# Altium PCB barbarov_guc_dagitim_karti.PcbDoc
Units mm, origin at the board's own origin, x right, y up, seen from the top; angles counter-clockwise.
Board outline 134.37 x 81.41 mm, 2 copper layers (Top Layer, Bottom Layer), stack 1.59 mm thick; 29 components, 11 nets, 108 pads, 0 vias.
Unrouted connection lines stored in the file: 6.
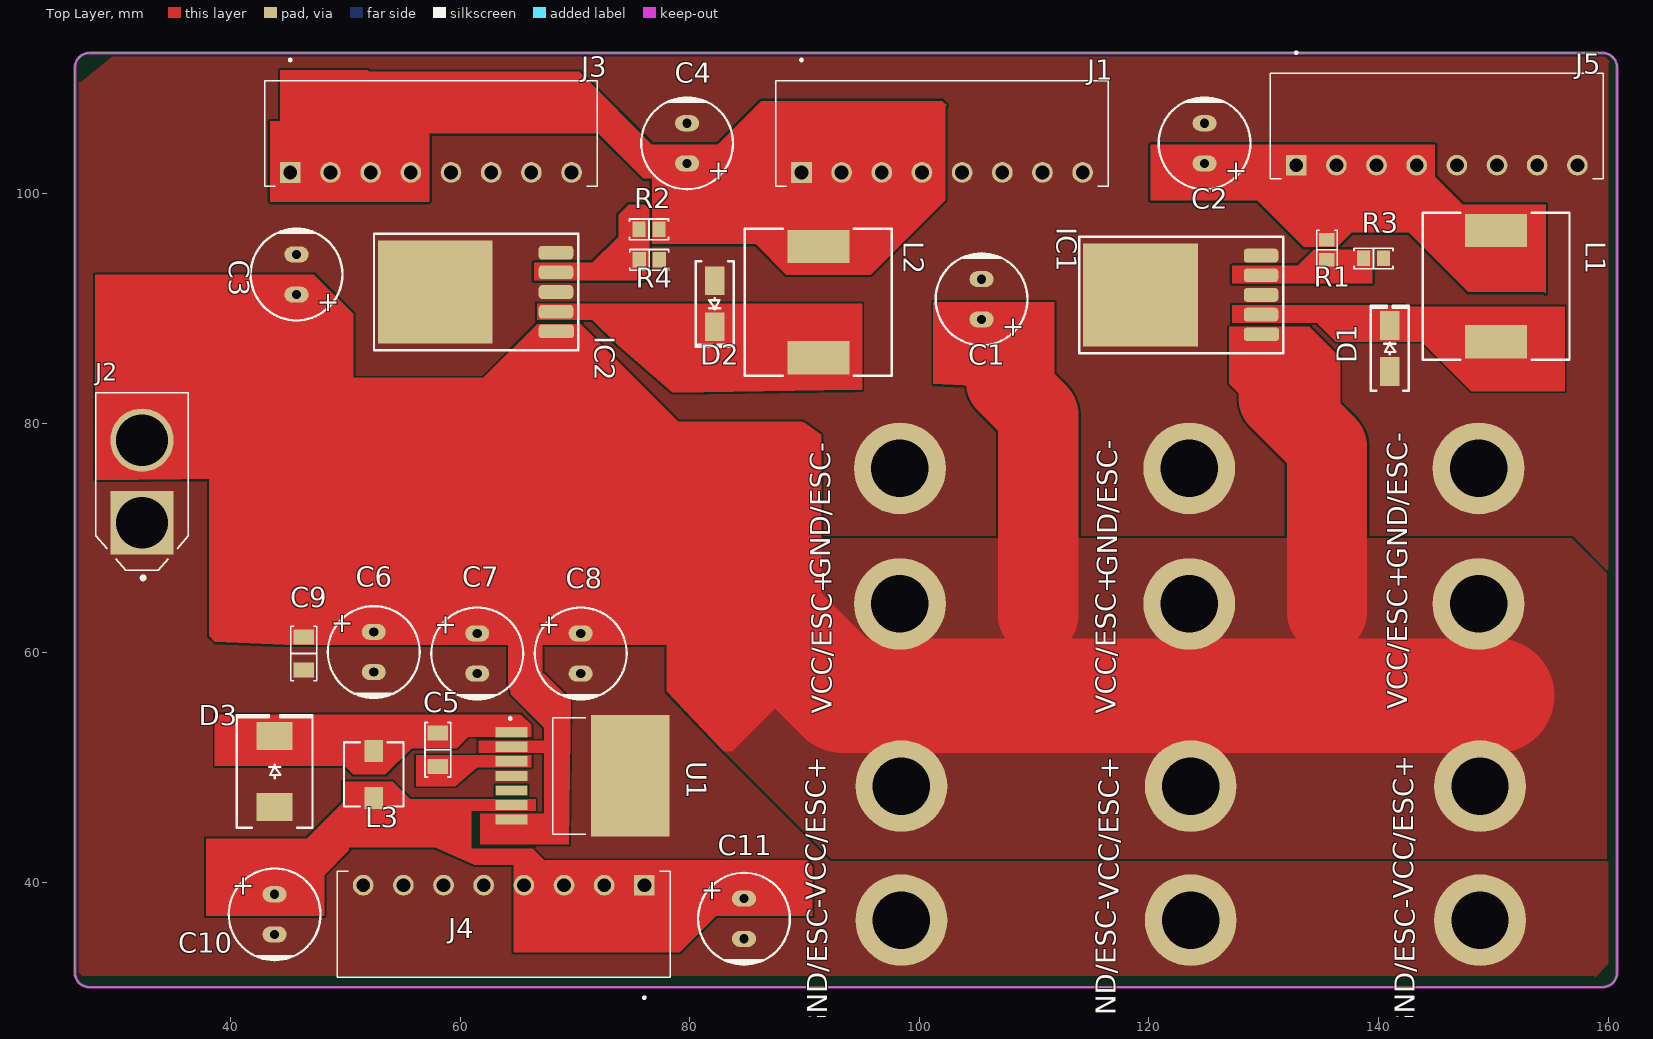
[diagram p0: Top Layer view]
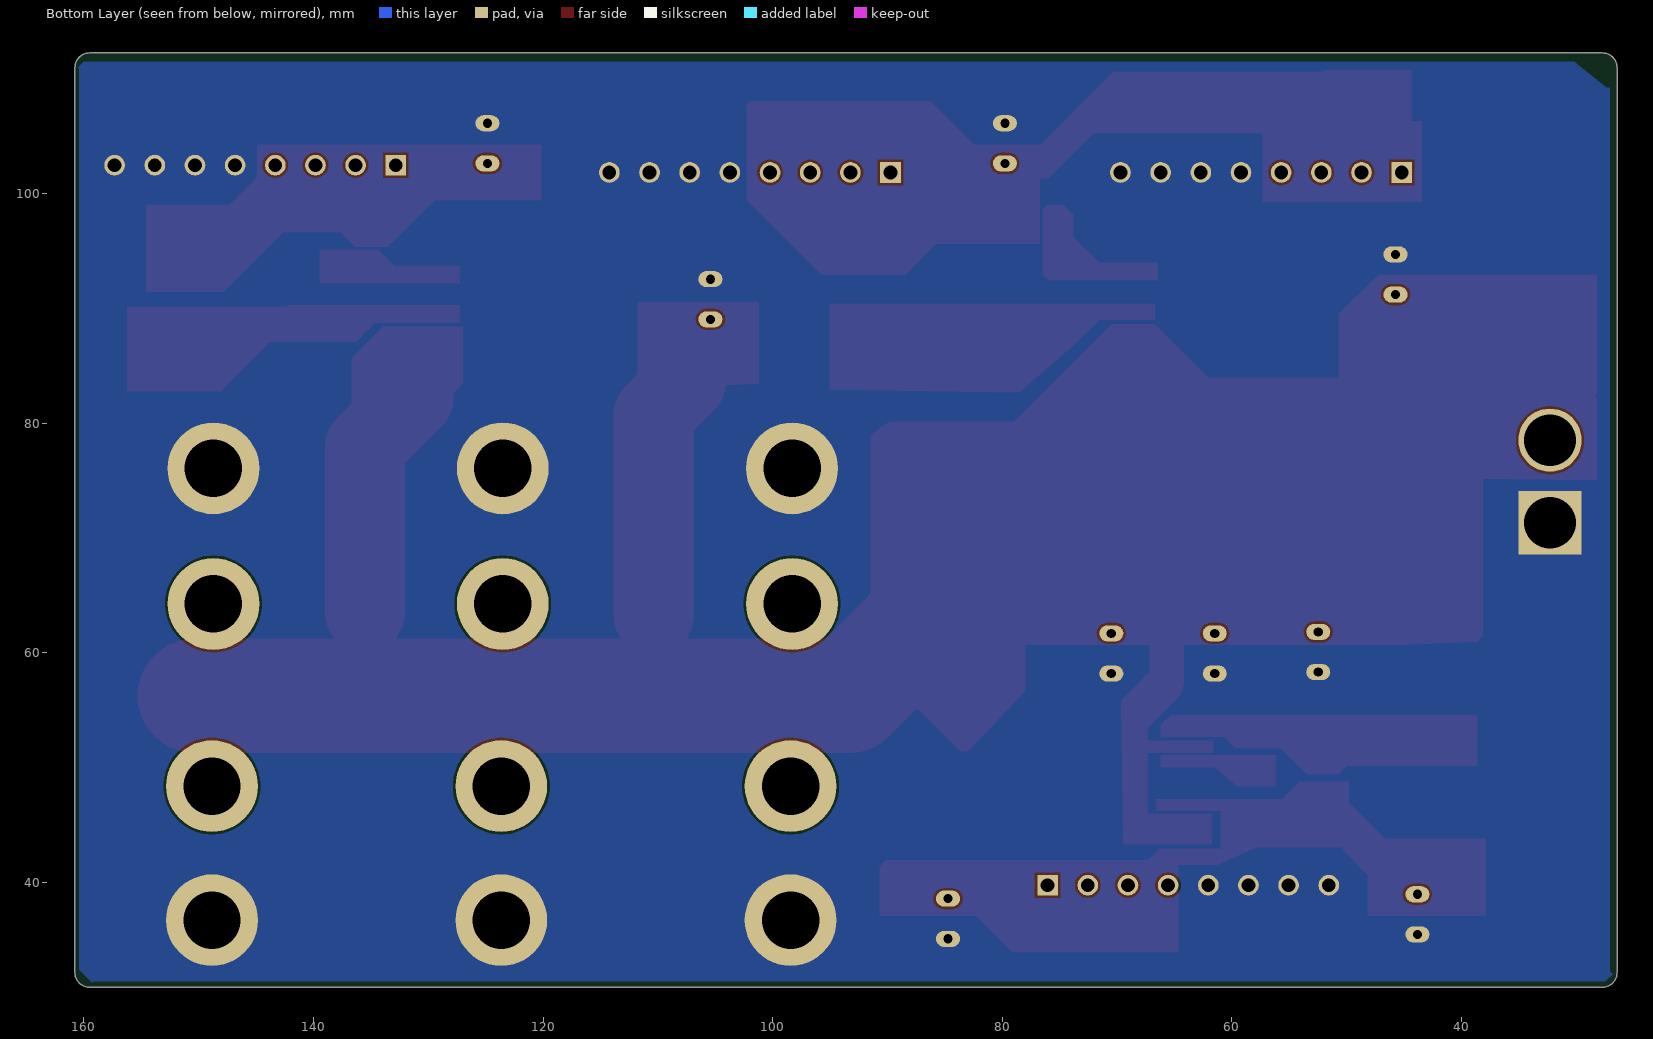
[diagram p1: Bottom Layer view, seen from below]
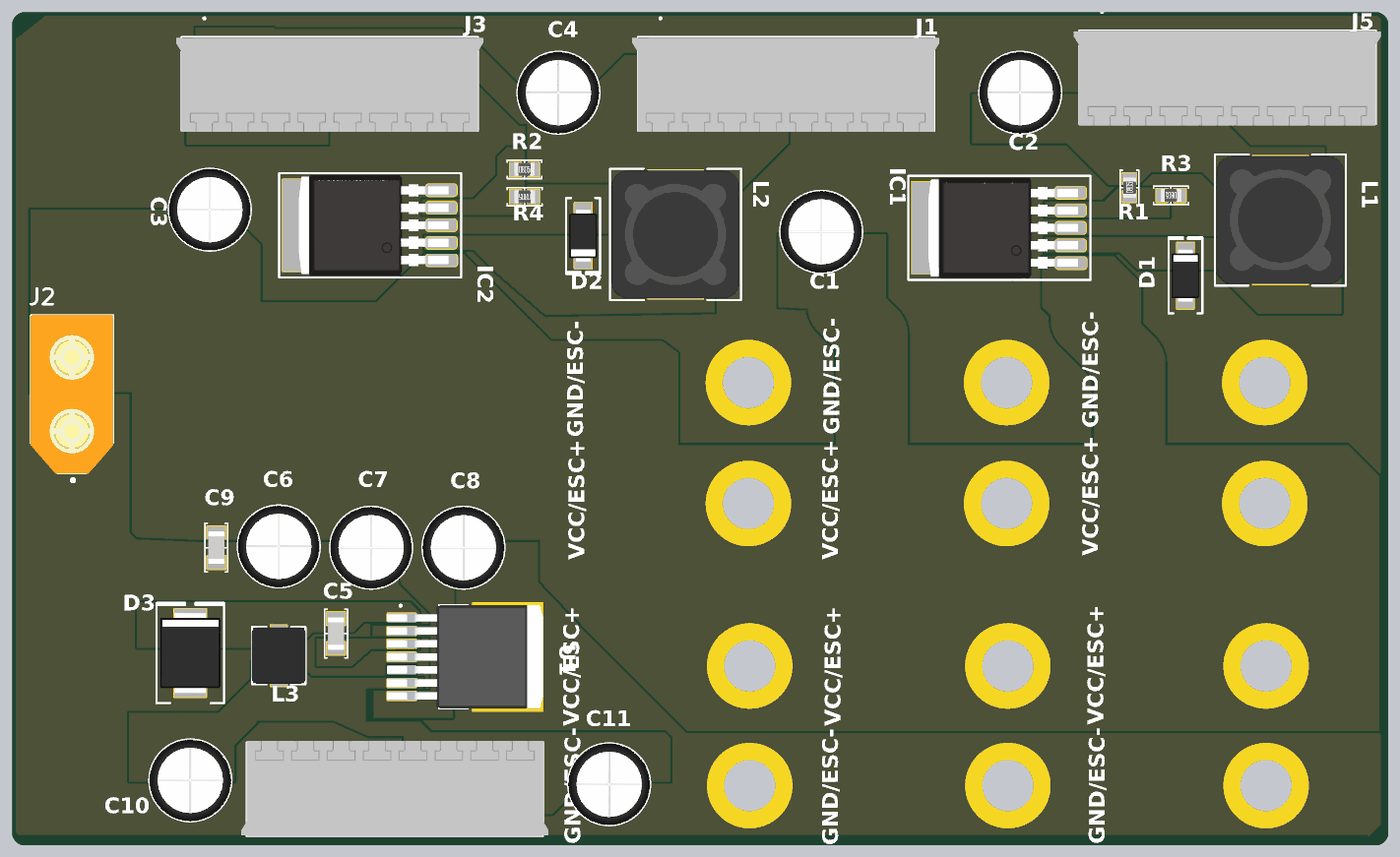
[diagram p2: 3D render of the assembled board from above, using the file's embedded part models]

## Layer stack, top to bottom
Top Solder: solder mask 0.0102, Solder Resist, Dk 3.5
Top Layer: signal copper 0.07
Dielectric 1: dielectric 1.45, FR-4, Dk 4.8
Bottom Layer: signal copper 0.07
Bottom Solder: solder mask 0.0102, Solder Resist, Dk 3.5

## Board outline
27.686,30.861 cw(c27.686,32.131) 26.416,32.131 26.416,110.998 cw(c27.686,110.998) 27.686,112.268 159.512,112.268 cw(c159.512,110.998) 160.782,110.998 160.782,32.131 cw(c159.512,32.131) 159.512,30.861

## Design rules (kind name [scope] priority, off if disabled: settings)
BoardOutlineClearance [All] p1: gap=0.2 ignorepadtopadclearanceinfootprint=FALSE
Clearance [All] p1: gap=0.203 ignorepadtopadclearanceinfootprint=FALSE except(0.25: Arc-Hole Track-Hole SMDPad-Hole THPad-Hole Via-Hole Fill-Hole Poly-Hole Region-Hole Text-Hole)
ComponentClearance [All] p1: gap=0.127 collisioncheckmode=3 verticalgap=0.127 showdistances=TRUE
DiffPairsRouting [All] p1: maxlimit=0.381 minlimit=0.203 mostfreqgap=0.203 toplayer_minwidth=0.203 toplayer_maxwidth=25.4 toplayer_prefwidth=0.203 bottomlayer_minwidth=0.203 bottomlayer_maxwidth=25.4 bottomlayer_prefwidth=0.203 maxuncoupledlength=12.7
Height [All] p1: minheight=0 maxheight=1816.048 prefheight=12.7
HoleSize [All] p1: absolutevalues=TRUE maxlimit=6.3 minlimit=0.3 maxpercent=80.000 minpercent=20.000
HoleToHoleClearance [All] p1: gap=0.25 allowstackedmicrovias=FALSE
MinimumAnnularRing [All] p1: minimumring=0.076
MinimumSolderMaskSliver [All] p1: minsoldermaskwidth=0
PlaneClearance [All] p1: clearance=0.203
PlaneConnect PlaneConnectPowerPads [InPadClass('PowerPads')] p1: planeconnectstyle=Direct reliefexpansion=0.508 reliefentries=4 reliefconductorwidth=0.254 reliefairgap=0.254
PlaneConnect [All] p2: pad.planeconnectstyle=Relief pad.reliefexpansion=0.3 pad.reliefentries=4 pad.reliefconductorwidth=0.203 pad.reliefairgap=0.203 via.planeconnectstyle=Direct via.reliefexpansion=0.3 via.reliefentries=4 via.reliefconductorwidth=0.127 via.reliefairgap=0.127
PolygonConnect PolygonConnectPowerPads [All vs (InPadClass('PowerPads'))] p1: connectstyle=Direct reliefconductorwidth=0.254 reliefentries=4 polygonreliefangle="90 Angle" airgapwidth=0.254
PolygonConnect [All] p2: thpad.connectstyle=Direct thpad.reliefconductorwidth=0.203 thpad.reliefentries=4 thpad.polygonreliefangle="90 Angle" thpad.airgapwidth=0.203 smdpad.connectstyle=Relief smdpad.reliefconductorwidth=0.8 smdpad.reliefentries=4 smdpad.polygonreliefangle="90 Angle" smdpad.airgapwidth=0.1 via.connectstyle=Direct via.reliefconductorwidth=0.127 via.reliefentries=4 via.polygonreliefangle="90 Angle" via.airgapwidth=0.127
RoutingVias [All] p1: holewidth=0.3 width=0.6 viastyle="Through Hole" minholewidth=0.3 minwidth=0.6 maxholewidth=0.6 maxwidth=6.6
SilkToSilkClearance [All] p1: silktosilkclearance=0
SilkToSolderMaskClearance [IsPad] p1: minsilkscreentomaskgap=0.127 clearancetoexposedcopper=TRUE
SolderMaskExpansion [All] p1: expansion=0.075 istentingtop=FALSE
Width [All] p1: maxlimit=25.4 minlimit=0.203 preferedwidth=0.203 minimp=50.000000 maximp=50.000000 favimp=50.000000
20 further rules are at their usual default settings.

## Components (designator, comment, footprint, x,y, rotation, side; value= is the part's Value field where it differs from the comment)
C1 "100µF" "CAP TH ALUM ELEC D8.00mm S3.50mm H12.50mm" 105.41,90.805 r270 top
C2 "220µF" "CAP TH ALUM ELEC D8.00mm S3.50mm H12.50mm" 124.841,104.394 r270 top
C3 "100µF" "CAP TH ALUM ELEC D8.00mm S3.50mm H12.50mm" 45.72,92.964 r270 top
C4 "220µF" "CAP TH ALUM ELEC D8.00mm S3.50mm H12.50mm" 79.756,104.394 r270 top
C5 "0.1µF" "CAP 1206_3216 - 1.8MM" 58.039,51.562 r270 top
C6 "15µF" "CAP TH ALUM ELEC D8.00mm S3.50mm H11.50mm" 52.451,60.071 r90 top
C7 "15µF" "CAP TH ALUM ELEC D8.00mm S3.50mm H11.50mm" 61.468,59.944 r90 top
C8 "15µF" "CAP TH ALUM ELEC D8.00mm S3.50mm H11.50mm" 70.485,59.944 r90 top
C9 "0.47µF" "CAP 1206_3216 - 1.8MM" 46.355,59.944 r90 top
C10 "180µF" "CAP TH ALUM ELEC D8.00mm S3.50mm H13.00mm" 43.815,37.211 r90 top
C11 "180µF" "CAP TH ALUM ELEC D8.00mm S3.50mm H13.00mm" 84.709,36.83 r90 top
D1 "ACDBA560-HF" "DO214AC SMA" 140.97,86.519 r90 top
D2 "ACDBA560-HF" "DO214AC SMA" 82.169,90.424 r270 top
D3 "SMLJ60S05-TP" "DO214AB SMC" 43.815,49.657 r90 top
IC1 "LM2596" D2PAK 120.904,91.186 r90 top
IC2 "LM2596" D2PAK 59.466,91.44 r90 top
J1 "KLEMENS" TE_284512-8 101.968,101.854 r0 top
J2 "XT60-M" AMASS_XT60-M 32.258,74.93 r90 top
J3 "KLEMENS" TE_284512-8 57.432,101.854 r0 top
J4 "KLEMENS" TE_284512-8 63.782,39.751 r180 top
J5 "KLEMENS" TE_284512-8 145.077,102.489 r0 top
L1 "33µH" "BOURNS SRR1280" 150.241,91.948 r90 top
L2 "33µH" "BOURNS SRR1280" 91.186,90.551 r90 top
L3 "2.2µH" "WURTH 5040" 52.451,49.403 r270 top
R1 "8.75 kOhms" "RES 0805_2012" 135.509,95.123 r90 top
R2 "3 kOhms" "RES 0805_2012" 76.44,96.901 r0 top
R3 "1 kOhms" "RES 0805_2012" 139.559,94.361 r180 top
R4 "1 kOhms" "RES 0805_2012" 76.454,94.234 r180 top
U1 "LM2678SX-5.0/NOPB" TO127P1435X464-8N 70.643,49.276 r270 top

## Footprints (in the part's own frame and the unit in brackets; to place one, negate y for a bottom-side part, rotate by r counter-clockwise, add the part's x,y. Pads: shape width x height; smd on the part's side, far side on the other; paste and mask are expansions set on the pad)
AMASS_XT60-M [mm]
  rect 5.516x5.516 hole 4.5: 1(-3.6,0)
  round 5.516 hole 4.5: 2(3.6,0)
  silkscreen extent -8.55,-4.05 7.75,4.05, body extent -7.75,-4.05 7.75,4.05, height 15.88
"BOURNS SRR1280" [mm] "Precision Wire Wound Inductor, 2-Leads, Body 12.50x12.50mm, IPC Medium Density"
  rect 2.9x5.4 smd: 1(-4.85,0) 2(4.85,0)
  silkscreen extent -6.4,-6.4 6.4,6.4, body extent -6.25,-6.25 6.25,6.25, height 7.9
"CAP 1206_3216 - 1.8MM" [mm] "Chip Capacitor, 2-Leads, Body 3.25x1.60mm, IPC Medium Density"
  rect 1.3x1.8 smd: 1(-1.45,0) 2(1.45,0)
  silkscreen extent -2.37,-1.12 2.37,1.12, body extent -1.6,-0.8 1.6,0.8, height 1.8
"CAP TH ALUM ELEC D8.00mm S3.50mm H11.50mm" [mm] "8mm Diameter 3.5mm Lead Spacing Aluminum Electrolytic Capacitors Radial, Can"
  oval 1.4x2.1 hole 0.8: 1(1.75,0) 2(-1.75,0)
  silkscreen extent -4,-4 4,4, body extent -4.01,-4 4,4, height 11.5
"CAP TH ALUM ELEC D8.00mm S3.50mm H12.50mm" [mm] "8mm Diameter 3.5mm Lead Spacing Aluminum Electrolytic Capacitors Radial, Can"
  oval 1.4x2.1 hole 0.8: 1(1.75,0) 2(-1.75,0)
  silkscreen extent -4,-4 4,4, body extent -4.01,-4 4,4, height 12.5
"CAP TH ALUM ELEC D8.00mm S3.50mm H13.00mm" [mm] "8mm Diameter 3.5mm Lead Spacing Aluminum Electrolytic Capacitors Radial, Can"
  oval 1.4x2.1 hole 0.8: 1(1.75,0) 2(-1.75,0)
  silkscreen extent -4,-4 4,4, body extent -4.01,-4 4,4, height 13
D2PAK [mm]
  rrect50% 1.2x3.075 smd: 1(-3.429,-8.89)
  rrect50% 1.2x3.015 smd: 2(-1.714,-8.86) 3(0,-8.86) 4(1.715,-8.86) 5(3.429,-8.86)
  rect 9x10 smd: 3(0,1.651)
  silkscreen extent -5.08,-10.79 5.08,6.98, body extent -4.91,-9.56 4.91,5.04, height 4.22
"DO214AB SMC" [mm] "Molded Diode, 2-Leads, Body 6.85x5.90mm, IPC Medium Density"
  rect 2.45x3.15 smd: 1(-3.1,0) 2(3.1,0)
  silkscreen extent -4.9,-3.3 4.9,3.3, body extent -3.97,-2.95 3.97,2.95, height 2.6
"DO214AC SMA" [mm] "Molded Diode, 2-Leads, Body 4.30x2.60mm, IPC Medium Density"
  rect 2.5x1.7 smd: 1(-2,0) 2(2,0)
  silkscreen extent -3.68,-1.65 3.75,1.65, body extent -2.6,-1.37 2.6,1.37, height 2.4
"RES 0805_2012" [mm] "Chip Resistor, 2-Leads, Body 2.00x1.25mm, IPC Medium Density"
  rect 1.15x1.35 smd: 1(-0.875,0) 2(0.875,0)
  silkscreen extent -1.7,-0.9 1.7,0.9, body extent -1,-0.62 1,0.63, height 0.6
TE_284512-8 [mm]
  rect 1.8x1.8 hole 1.2: 1(-12.25,0)
  round 1.8 hole 1.2: 2(-8.75,0) 3(-5.25,0) 4(-1.75,0) 5(1.75,0) 6(5.25,0) 7(8.75,0) 8(12.25,0)
  silkscreen extent -14.5,-1.2 14.5,9.9, body extent -15.01,-1.3 14.99,7.9, height 9.33
TO127P1435X464-8N [mm]
  rect 0.89x2.79 smd: 1(-3.81,-6.19) 2(-2.54,-6.19) 3(-1.27,-6.19) 4(0,-6.19) 5(1.27,-6.19) 6(2.54,-6.19) 7(3.81,-6.19)
  rect 10.58x6.84 smd paste-6: 8(0,4.16)
  silkscreen extent -5.1,-6.4 5.08,0.3, body extent -5.05,-7.62 5.05,7.62, height 4.65
"WURTH 5040" [mm] "Wire Wound Inductor, 2-Leads, Body 5.60x5.30mm, IPC Medium Density"
  rect 1.9x1.6 smd: 1(-2.05,0) 2(2.05,0)
  silkscreen extent -2.8,-2.6 2.8,2.6, body extent -2.79,-2.65 2.79,2.65, height 4

## Part data
C1 C3: library part ECA-1JM101, "CAP ALUM 100UF 20% 63V RADIAL", Device Package="Radial, Can", Lifetime @ Temp.="2000 Hrs @ 85°C", Manufacturer="Panasonic Electronic Components", Operating Temperature="-40°C ~ 85°C", Ripple Current @ High Frequency="459mA @ 10kHz", Ripple Current @ Low Frequency="270mA @ 120Hz", Supplier Part Number 1=P5193-ND, Tolerance=±20%, Voltage - Rated=63V, Applications="General Purpose", Capacitance=100µF, ComponentLink1Description=Datasheet, ComponentLink1URL=//media.digikey.com/pdf/Data%20Sheets/Panasonic%20Electronic%20Components/ECA-xxM%20Series,TypeA.pdf, ComponentLink2Description="DigiKey Link", ComponentLink2URL=http://digikey.com/product-detail/en/panasonic-electronic-components/ECA-1JM101/P5193-ND/245052, Height - Seated (Max)="0.492\" (12.50mm)", LastUpdated="2020-09-07 05:24:51", Lead Spacing="0.138\" (3.50mm)", Lifecycle Status=Active, Minimum Order=1, Mounting Type="Through Hole", Package / Case="Radial, Can", Packaging=Bulk, Part Number=ECA-1JM101, Part Status=Active, PartId=7225, Polarization=Polar, Price=0.37, Series=M, Size / Dimension="0.315\" Dia (8.00mm)", Supplier 1=DigiKey
C2 C4: library part ECA-1VM221, "CAP ALUM 220UF 20% 35V RADIAL", Device Package="Radial, Can", Lifetime @ Temp.="2000 Hrs @ 85°C", Manufacturer="Panasonic Electronic Components", Operating Temperature="-40°C ~ 85°C", Ripple Current @ High Frequency="595mA @ 10kHz", Ripple Current @ Low Frequency="350mA @ 120Hz", Supplier Part Number 1=P5166-ND, Tolerance=±20%, Voltage - Rated=35V, Applications="General Purpose", Capacitance=220µF, ComponentLink1Description=Datasheet, ComponentLink1URL=//media.digikey.com/pdf/Data%20Sheets/Panasonic%20Electronic%20Components/ECA-xxM%20Series,TypeA.pdf, ComponentLink2Description="DigiKey Link", ComponentLink2URL=http://digikey.com/product-detail/en/panasonic-electronic-components/ECA-1VM221/P5166-ND/245025, Height - Seated (Max)="0.492\" (12.50mm)", LastUpdated="2020-09-07 05:24:51", Lead Spacing="0.138\" (3.50mm)", Lifecycle Status=Active, Minimum Order=1, Mounting Type="Through Hole", Package / Case="Radial, Can", Packaging=Bulk, Part Number=ECA-1VM221, Part Status=Active, PartId=7280, Polarization=Polar, Price=0.31, Series=M, Size / Dimension="0.315\" Dia (8.00mm)", Supplier 1=DigiKey
C5: library part C3216X7R2A474K160AE, "CAP CER 0.47UF 100V X7R 1206", Capacitance=0.47µF, Device Package="1206 (3216 Metric)", Manufacturer="TDK Corporation", Operating Temperature="-55°C ~ 125°C", Supplier Part Number 1=445-8902-1-ND, Temperature Coefficient=X7R, Tolerance=±10%, Voltage - Rated=100V, Applications="Boardflex Sensitive", ComponentLink1Description=Datasheet, ComponentLink1URL=https://product.tdk.com/info/en/catalog/datasheets/mlcc_commercial_soft_en.pdf?ref_disty=digikey, ComponentLink2Description="DigiKey Link", ComponentLink2URL=http://digikey.com/product-detail/en/tdk-corporation/C3216X7R2A474K160AE/445-8902-1-ND/3283711, Features="Soft Termination", LastUpdated="2.09.2020 01:05:29", Lifecycle Status=Active, Minimum Order=1, Mounting Type="Surface Mount, MLCC", Package / Case="1206 (3216 Metric)", Packaging=TapeAndReel, Part Number=C3216X7R2A474K160AE, Part Status=Active, PartId=22076, Price=0.22, Series=C, Size / Dimension="0.126\" L x 0.063\" W (3.20mm x 1.60mm)", Supplier 1=DigiKey, Thickness (Max)="0.063\" (1.60mm)"
C6 C7 C8: library part UPW2A150MPD, "CAP ALUM 15UF 20% 100V RADIAL", Device Package="Radial, Can", Lifetime @ Temp.="3000 Hrs @ 105°C", Manufacturer=Nichicon, Operating Temperature="-55°C ~ 105°C", Ripple Current @ High Frequency="180mA @ 100kHz", Ripple Current @ Low Frequency="54mA @ 120Hz", Supplier Part Number 1=493-1968-ND, Tolerance=±20%, Voltage - Rated=100V, Applications="General Purpose", Capacitance=15µF, ComponentLink1Description=Datasheet, ComponentLink1URL=http://nichicon-us.com/english/products/pdfs/e-upw.pdf, ComponentLink2Description="DigiKey Link", ComponentLink2URL=http://digikey.com/product-detail/en/nichicon/UPW2A150MPD/493-1968-ND/589709, Height - Seated (Max)="0.453\" (11.50mm)", LastUpdated="7.09.2020 05:24:50", Lead Spacing="0.138\" (3.50mm)", Lifecycle Status=Active, Minimum Order=1, Mounting Type="Through Hole", Package / Case="Radial, Can", Packaging=Bulk, Part Number=UPW2A150MPD, Part Status=Active, PartId=23526, Polarization=Polar, Price=0.39, Series=UPW, Size / Dimension="0.315\" Dia (8.00mm)", Supplier 1=DigiKey, Impedance="830 mOhms"
C9: library part C3216X7R2A474K160AE, "CAP CER 0.47UF 100V X7R 1206", Device Package="1206 (3216 Metric)", Manufacturer="TDK Corporation", Operating Temperature="-55°C ~ 125°C", Supplier Part Number 1=445-8902-1-ND, Temperature Coefficient=X7R, Tolerance=±10%, Voltage - Rated=100V, Applications="Boardflex Sensitive", Capacitance=0.47µF, ComponentLink1Description=Datasheet, ComponentLink1URL=https://product.tdk.com/info/en/catalog/datasheets/mlcc_commercial_soft_en.pdf?ref_disty=digikey, ComponentLink2Description="DigiKey Link", ComponentLink2URL=http://digikey.com/product-detail/en/tdk-corporation/C3216X7R2A474K160AE/445-8902-1-ND/3283711, Features="Soft Termination", LastUpdated="2.09.2020 01:05:29", Lifecycle Status=Active, Minimum Order=1, Mounting Type="Surface Mount, MLCC", Package / Case="1206 (3216 Metric)", Packaging=TapeAndReel, Part Number=C3216X7R2A474K160AE, Part Status=Active, PartId=22076, Price=0.22, Series=C, Size / Dimension="0.126\" L x 0.063\" W (3.20mm x 1.60mm)", Supplier 1=DigiKey, Thickness (Max)="0.063\" (1.60mm)"
C10 C11: library part 860080474009, "CAP ALUM 180UF 20% 25V THRU HOLE", Device Package="Radial, Can", Lifetime @ Temp.="3000 Hrs @ 105°C", Manufacturer="Würth Elektronik", Operating Temperature="-55°C ~ 105°C", Ripple Current @ High Frequency="620mA @ 100kHz", Supplier Part Number 1=732-9025-1-ND, Tolerance=±20%, Voltage - Rated=25V, Applications="General Purpose", Capacitance=180µF, ComponentLink1Description=Datasheet, ComponentLink1URL=https://katalog.we-online.de/pbs/datasheet/860080474009.pdf, ComponentLink2Description="DigiKey Link", ComponentLink2URL=http://digikey.com/product-detail/en/w-rth-elektronik/860080474009/732-9025-1-ND/5728968, Height - Seated (Max)="0.512\" (13.00mm)", LastUpdated="7.09.2020 05:24:55", Lead Spacing="0.138\" (3.50mm)", Lifecycle Status=Active, Minimum Order=1, Mounting Type="Through Hole", Package / Case="Radial, Can", Packaging=TapeAndBox, Part Number=860080474009, Part Status=Active, PartId=24217, Polarization=Polar, Price=0.15, Series=WCAP-ATLI, Size / Dimension="0.315\" Dia (8.00mm)", Supplier 1=DigiKey, Impedance="98 mOhms"
D1 D2: "DIODE SCHOTTKY 60V 5A DO214AC", Capacitance @ Vr, F="250pF @ 4V, 1MHz", Current - Average Rectified (Io)="5A (DC)", Current - Reverse Leakage @ Vr="500µA @ 60V", Manufacturer="Comchip Technology", Operating Temperature - Junction="-55°C ~ 125°C", Package / Case="DO-214AC, SMA", Supplier Device Package="DO-214AC (SMA)", Supplier Part Number 1=641-2078-1-ND, Voltage - DC Reverse (Vr) (Max)=60V, Voltage - Forward (Vf) (Max) @ If="700mV @ 5A", ComponentLink1Description=Datasheet, ComponentLink1URL=http://www.comchiptech.com/admin/files/product/ACDBA560-HF%20RevA201382.pdf, ComponentLink2Description="DigiKey Link", ComponentLink2URL=http://digikey.com/product-detail/en/comchip-technology/ACDBA560-HF/641-2078-1-ND/10131664, Diode Type=Schottky, LastUpdated="2020-09-02 01:19:04", Lifecycle Status=Active, Minimum Order=1, Mounting Type="Surface Mount", Packaging=TapeAndReel, Part Number=ACDBA560-HF, Part Status=Active, PartId=1832, Price=0.13, Series="Automotive, AEC-Q101", Speed="Fast Recovery =< 500ns, > 200mA (Io)", Supplier 1=DigiKey
D3: "DIODE GEN PURP 50V 6A DO214AB", Capacitance @ Vr, F="150pF @ 4V, 1MHz", Current - Average Rectified (Io)=6A, Current - Reverse Leakage @ Vr="5µA @ 50V", Manufacturer="Micro Commercial Co", Operating Temperature - Junction="-55°C ~ 150°C", Package / Case="DO-214AB, SMC", Supplier Device Package="DO-214AB (SMC)", Supplier Part Number 1=SMLJ60S05-TPMSCT-ND, Voltage - DC Reverse (Vr) (Max)=50V, Voltage - Forward (Vf) (Max) @ If="1V @ 6A", ComponentLink1Description=Datasheet, ComponentLink1URL=https://www.mccsemi.com/pdf/Products/SMLJ60S05~SMLJ60S10(DO-214AB).pdf, ComponentLink2Description="DigiKey Link", ComponentLink2URL=http://digikey.com/product-detail/en/micro-commercial-co/SMLJ60S05-TP/SMLJ60S05-TPMSCT-ND/2404599, Diode Type=Standard, LastUpdated="2.09.2020 01:18:57", Lifecycle Status=Active, Minimum Order=1, Mounting Type="Surface Mount", Packaging=TapeAndReel, Part Number=SMLJ60S05-TP, Part Status=Active, PartId=345, Price=0.40, Series=-, Speed="Standard Recovery >500ns, > 200mA (Io)", Supplier 1=DigiKey
J1 J3 J4 J5: library part 284512-8, "8 POS TERMI-BLOK HDR 900 POLAR", Package=None, Availability=Unavailable, Centerline_Pitch="3.5 mm[.138 in]", EU_RoHS_Compliance=Compliant, MF="TE Connectivity", MP=284512-8, Number_of_Positions=8, Price=None, SnapEDA_Link=https://www.snapeda.com/parts/284512-8/TE%20Connectivity%20AMP%20Connectors/view-part/467023/?ref=snap, TE_purchase_URL=https://www.te.com/usa-en/product-284512-8.html?te_bu=Cor&te_type=disp&te_campaign=seda_glo_cor-seda-global-disp-prtnr-fy19-seda-model-bom-cta_sma-317_1&elqCampaignId=32493
J2: "Plug; DC supply; XT60; male; PIN: 2; for cable; soldered; 30A; 500V", Package="Package Analog Devices", Availability=Unavailable, MF=AMASS, MP=XT60-M, Price=None, SnapEDA_Link=https://www.snapeda.com/parts/XT60-M/AMASS/view-part/2883912/?ref=snap
L1 L2: library part SRR1280-330M, "FIXED IND 33UH 3.5A 57 MOHM SMD", Current - Saturation=3.3A, Current Rating (Amps)=3.5A, DC Resistance (DCR)="57mOhm Max", Device Package=Nonstandard, Frequency - Self Resonant=9.5MHz, Manufacturer="Bourns Inc.", Operating Temperature="-40°C ~ 125°C", Q @ Freq="28 @ 2.52MHz", Supplier Part Number 1=SRR1280-330MCT-ND, Tolerance=±20%, Inductance Frequency - Test=100kHz, ComponentLink1Description=Datasheet, ComponentLink1URL=https://www.bourns.com/docs/Product-Datasheets/SRR1280.pdf, ComponentLink2Description="DigiKey Link", ComponentLink2URL=http://digikey.com/product-detail/en/bourns-inc/SRR1280-330M/SRR1280-330MCT-ND/2127440, Height - Seated (Max)="0.315\" (8.00mm)", LastUpdated="2020-09-02 01:22:09", Lifecycle Status=Active, Material - Core=Ferrite, Minimum Order=1, Mounting Type="Surface Mount", Package / Case=Nonstandard, Packaging=TapeAndReel, Part Number=SRR1280-330M, Part Status=Active, PartId=25, Price=0.65, Series=SRR1280, Shielding=Shielded, Size / Dimension="0.492\" L x 0.492\" W (12.50mm x 12.50mm)", Supplier 1=DigiKey, Type=Wirewound, Inductance=33µH
L3: library part 744316220, "FIXED IND 2.2UH 7.5A 11.3 MOHM", Current - Saturation=7.5A, DC Resistance (DCR)=11.3mOhm, Frequency - Self Resonant=108MHz, Manufacturer="Würth Elektronik", Operating Temperature="-40°C ~ 150°C", Package / Case=2-SMD, Ratings=AEC-Q200, Supplier Device Package=5040, Supplier Part Number 1=732-6179-1-ND, Tolerance=±20%, Inductance Frequency - Test=100kHz, ComponentLink1Description=Datasheet, ComponentLink1URL=https://katalog.we-online.de/pbs/datasheet/744316220.pdf, ComponentLink2Description="DigiKey Link", ComponentLink2URL=http://digikey.com/product-detail/en/w-rth-elektronik/744316220/732-6179-1-ND/5050830, Current Rating (Amps)=7.5A, Height - Seated (Max)="0.169\" (4.30mm)", LastUpdated="2.09.2020 01:22:18", Lifecycle Status=Active, Material - Core=2-SMD, Minimum Order=1, Mounting Type="Surface Mount", Packaging=TapeAndReel, Part Number=744316220, Part Status=Active, PartId=256, Price=1.61, Series=WE-HCI, Shielding=Shielded, Size / Dimension="0.217\" L x 0.209\" W (5.50mm x 5.30mm)", Supplier 1=DigiKey, Type=Wirewound, Inductance=2.2µH
R1 R2: library part RNCP0805FTD10K0, "RES 10K OHM 1% 1/4W 0805", Device Package="0805 (2012 Metric)", Manufacturer="Stackpole Electronics Inc", Operating Temperature="-55°C ~ 155°C", Power (Watts)="0.25W, 1/4W", Resistance="10 kOhms", Supplier Device Package=0805, Supplier Part Number 1=RNCP0805FTD10K0CT-ND, Temperature Coefficient=±100ppm/°C, Tolerance=±1%, ComponentLink1Description=Datasheet, ComponentLink1URL=https://www.seielect.com/catalog/sei-rncp.pdf, ComponentLink2Description="DigiKey Link", ComponentLink2URL=http://digikey.com/product-detail/en/stackpole-electronics-inc/RNCP0805FTD10K0/RNCP0805FTD10K0CT-ND/2240601, Composition="Thin Film", Features="Anti-Sulfur, Moisture Resistant", Height - Seated (Max)="0.024\" (0.60mm)", LastUpdated="2020-09-02 01:15:23", Lifecycle Status=Active, Minimum Order=1, Number of Terminations=2, Package / Case="0805 (2012 Metric)", Packaging=TapeAndReel, Part Number=RNCP0805FTD10K0, Part Status=Active, PartId=28021, Price=0.01, Series=RNCP, Size / Dimension="0.079\" L x 0.049\" W (2.00mm x 1.25mm)", Supplier 1=DigiKey
R3 R4: library part CRGP0805F4K7, "CRGP 0805 4K7 1%", Device Package="0805 (2012 Metric)", Manufacturer="TE Connectivity Passive Product", Operating Temperature="-55°C ~ 155°C", Power (Watts)="0.333W, 1/3W", Resistance="4.7 kOhms", Supplier Device Package=0805, Supplier Part Number 1=A130485CT-ND, Temperature Coefficient=±100ppm/°C, Tolerance=±1%, ComponentLink1Description=Datasheet, ComponentLink1URL=https://www.te.com/commerce/DocumentDelivery/DDEController?Action=srchrtrv&DocNm=9-1773463-9&DocType=DS&DocLang=English, ComponentLink2Description="DigiKey Link", ComponentLink2URL=http://digikey.com/product-detail/en/te-connectivity-passive-product/CRGP0805F4K7/A130485CT-ND/8578317, Composition="Thick Film", Features="Pulse Withstanding", Height - Seated (Max)="0.026\" (0.65mm)", LastUpdated="2020-09-02 01:15:22", Lifecycle Status=Active, Minimum Order=1, Number of Terminations=2, Package / Case="0805 (2012 Metric)", Packaging=TapeAndReel, Part Number=CRGP0805F4K7, Part Status=Active, PartId=28726, Price=0.02, Series=CRGP, Size / Dimension="0.079\" L x 0.049\" W (2.00mm x 1.25mm)", Supplier 1=DigiKey
U1: "8V to 40V, 5A SIMPLE SWITCHER buck converter with high efficiency 7-DDPAK/TO-263 -40 to 125", Package="TO-263-7 Texas Instruments", Check_prices=https://www.snapeda.com/parts/LM2678SX-5.0/NOPB/Texas%20Instruments/view-part/1219450/?ref=eda, Digi-Key_Part_Number=LM2678SX-5.0/NOPBCT-ND, MF="Texas Instruments", MP=LM2678SX-5.0/NOPB, Purchase-URL=https://pricing.snapeda.com/search/part/LM2678SX-5.0/NOPB/?ref=eda, SnapEDA_Link=https://www.snapeda.com/parts/LM2678SX-5.0/NOPB/Texas%20Instruments/view-part/1219450/?ref=snap

## Free pads (board coordinates)
  round 8 hole 5 mask+0.175: 4(98.298,64.262) 4(123.634,36.703) 4(148.717,64.262) 5(98.425,48.387) 5(123.507,76.073) 5(148.844,48.387) 6(98.298,76.073) 6(123.634,48.387) 6(148.844,36.703) 7(98.425,36.703) 7(123.507,64.262) 7(148.717,76.073)

## Nets (pads, with @x,y where several pads share a name; then routed paths per layer and width w, separated by ;. In a path a pad name is that pad's centre, name@x,y a point inside that pad or via, vN(x,y) a via of type N, cw(c..) or ccw(c..) an arc to the next point about the centre after c; other vN are vias at no path point)
12vFeedBack: IC1.4 R1.1 R3.2
+5: C4.1 J1.1 J1.2 J1.3 J1.4 J3.1 J3.2 J3.3 J3.4 L2.2 R2.2
+5V/5A: C10.1 C11.1 J4.1 J4.2 J4.3 J4.4 L3.2 U1.6
+12: C2.1 J5.1 J5.2 J5.3 J5.4 L1.2 R1.2
FeedBack: IC2.4 R2.1 R4.2
GND: C1.2 C2.2 C3.2 C4.2 C6.2 C7.2 C8.2 C9.1 C10.2 C11.2 D1.1 D2.1 D3.1 IC1.3 IC1.5 IC2.3 IC2.5 J1.5 J1.6 J1.7 J1.8 J2.1 J3.5 J3.6 J3.7 J3.8 J4.5 J4.6 J4.7 J4.8 J5.5 J5.6 J5.7 J5.8 pad.4@123.634,36.703 pad.5@123.507,76.073 pad.6@98.298,76.073 pad.6@148.844,36.703 pad.7@98.425,36.703 pad.7@148.717,76.073 R3.1 R4.1 U1.4 U1.8
NetC5_1: C5.1 D3.2 L3.1 U1.1
NetC5_2: C5.2 U1.3
NetD1_2: D1.2 IC1.2 L1.1
NetD2_2: D2.2 IC2.2 L2.1
VCC: C1.1 C3.1 C6.1 C7.1 C8.1 C9.2 IC1.1 IC2.1 J2.2 pad.4@98.298,64.262 pad.4@148.717,64.262 pad.5@98.425,48.387 pad.5@148.844,48.387 pad.6@123.634,48.387 pad.7@123.507,64.262 U1.2 U1.7 | length 160.9
  Top Layer w3: 65.659,62.992 65.659,57.404 67.31,55.753
  Top Layer w7: 107.569,83.566 110.363,80.772 110.363,63.246 ; 131.318,82.169 135.509,77.978 135.509,63.5
  Top Layer w10: 48.26,78.105 71.501,78.105 93.345,56.261 150.322,56.261
pads on no net: U1.5

## Polygon pours and split planes (outlines as drawn)
GND on Top Layer "GND_L01_P002" (solid, pour order 2): 26.67,109.728 26.924,109.728 29.464,111.76 29.718,112.014 159.639,112.014 160.147,111.506 160.02,111.379 160.02,32.893 158.877,31.75 158.75,31.877 27.051,31.877 26.416,32.512 26.67,32.766
VCC on Top Layer "VCC_L01_P000" (solid, pour order 0): 84.836,70.358 85.217,69.977 156.845,69.977 159.893,66.929 159.893,42.037 92.329,42.037 82.931,51.435 82.931,70.358 84.455,70.358 84.582,70.231
GND on Bottom Layer "GND_L02_P001" (solid, pour order 1): 27.051,109.22 27.305,109.22 29.845,111.252 30.099,111.506 160.02,111.506 160.528,110.998 160.401,110.871 160.401,32.385 159.258,31.242 159.131,31.369 27.432,31.369 26.797,32.004 27.051,32.258

## Keep-outs
Top Layer:
  lines w0.254: 26.416,32.131 ccw(c27.686,32.131) 27.686,30.861 159.512,30.861 ccw(c159.512,32.131) 160.782,32.131 160.782,32.639 160.782,110.998 ccw(c159.512,110.998) 159.512,112.268 27.686,112.268 ccw(c27.686,110.998) 26.416,110.998 26.416,32.131

## Other copper
Top Layer:
  region net +5: 70.358,110.617 52.07,110.617 51.943,110.744 44.323,110.744 44.323,105.791 44.831,105.283 72.009,105.283 75.946,101.346 82.55,101.346 82.931,101.727 82.931,103.759 77.216,103.759
  region net +5V/5A: 66.548,46.228 66.548,47.244 55.626,47.244 54.102,48.768 49.784,48.768 49.784,45.212 49.784,43.053 57.785,43.053 61.214,41.529 64.643,41.529 64.643,33.909 79.121,33.909 82.296,37.084 90.678,37.084 90.678,41.402 90.17,41.91 67.31,41.91 66.294,42.926 60.96,42.926 60.96,46.228
  region net VCC: 77.978,56.642 82.74,51.625 82.931,51.435 83.693,51.435 91.44,59.182 91.44,78.994 90.043,80.01 89.789,80.137 77.978,80.137
  region net VCC: 44.704,60.706 82.423,60.706 82.423,76.708 70.485,88.646 66.675,88.646 61.976,83.947 40.894,83.947 38.1,81.153 38.1,61.468 38.608,60.96
  region net +5V/5A: 37.846,37.084 37.846,43.815 46.609,43.815 50.038,47.244 50.292,47.244 50.292,42.799 48.133,40.64 48.133,37.084
  region net NetC5_2: 56.261,51.054 56.388,51.054 66.167,51.054 66.167,50.038 61.489,50.038 59.563,48.387 56.134,48.387 56.134,51.054
  region net NetC5_1: 38.608,50.165 49.911,50.165 50.673,49.403 53.467,49.403 55.753,51.689 59.69,51.689 60.706,52.705 66.167,52.705 66.167,53.721 65.278,54.61 38.608,54.61
  region net VCC: 61.722,45.974 61.722,43.307 69.459,43.307 69.596,55.88 67.31,58.166 64.389,58.166 64.389,56.388 67.31,53.467 67.31,52.324 61.595,52.324 61.595,51.308 67.31,51.308 67.31,45.974
  region net VCC: 127,88.392 133.985,88.392 136.652,85.725 136.652,79.502 130.937,79.502 127,83.439
  region net +12: 120.142,104.267 120.269,104.267 144.907,104.267 144.907,101.473 147.32,99.06 154.559,99.06 154.559,91.313 154.432,91.44 147.828,91.44 142.621,96.647 137.668,96.647 136.398,95.377 133.477,95.377 129.413,99.441 120.142,99.441
  region net NetD1_2: 127.254,88.773 127.254,90.297 142.24,90.297 142.367,90.17 156.21,90.17 156.21,82.804 148.082,82.804 143.764,87.122 136.271,87.122 134.62,88.773
  region net 12vFeedBack: 127.254,92.202 127.254,93.726 132.969,93.726 134.366,95.123 139.446,95.123 139.446,92.202
  region net VCC: 101.219,90.551 111.76,90.551 111.76,82.931 101.219,83.439
  region net +5: 76.708,95.631 85.725,95.631 88.392,92.964 95.758,92.964 102.235,99.441 102.235,100.965 102.235,107.569 102.362,107.696 101.981,108.077 86.233,108.077 82.423,104.267 77.216,104.267 76.708,104.267
  region net FeedBack: 66.421,92.456 66.421,93.98 71.501,93.98 73.787,96.266 73.787,98.171 74.676,99.06 76.073,99.06 76.454,98.679 76.454,92.964 75.946,92.456 73.152,92.456
  region net +5: 43.434,99.822 43.434,99.949 43.434,106.299 57.277,106.299 57.277,99.314 43.434,99.314
  region net NetD2_2: 66.675,89.027 66.675,90.424 73.406,90.424 83.947,90.424 94.996,90.424 94.996,82.931 94.361,82.931 78.486,82.677 73.787,86.741 71.501,89.027
  region net VCC: 28.194,82.169 28.321,82.296 28.194,82.423 28.194,92.964 47.244,92.964 50.673,89.535 50.673,76.708 50.673,75.819 50.673,75.311 28.194,75.057

## Silkscreen, mask and mechanical layers (free items; w line width, h text height)
Top Overlay:
  text "GND/ESC-" at 143.129,67.322 h3 r90
  text "GND/ESC-" at 117.856,66.687 h3 r90
  text "GND/ESC-" at 92.837,66.433 h3 r90
  text "VCC/ESC+" at 143.129,55.074 h3 r90
  text "VCC/ESC+" at 92.964,54.693 h3 r90
  text "VCC/ESC+" at 117.729,54.693 h3 r90
  text "VCC/ESC+" at 143.637,38.564 h3 r90
  text "VCC/ESC+" at 92.456,38.437 h3 r90
  text "VCC/ESC+" at 117.983,38.437 h3 r90
  text "GND/ESC-" at 92.583,26.682 h3 r90
  text "GND/ESC-" at 143.764,26.682 h3 r90
  text "GND/ESC-" at 117.729,26.555 h3 r90

## Text inside footprints (layer, text, board x,y; h text height)
C1: Top Overlay "+" at 106.81,89.355 h3 r270
C2: Top Overlay "+" at 126.241,102.944 h3 r270
C3: Top Overlay "+" at 47.12,91.514 h3 r270
C4: Top Overlay "+" at 81.156,102.944 h3 r270
C6: Top Overlay "+" at 51.051,61.521 h3 r90
C7: Top Overlay "+" at 60.068,61.394 h3 r90
C8: Top Overlay "+" at 69.085,61.394 h3 r90
C10: Top Overlay "+" at 42.415,38.661 h3 r90
C11: Top Overlay "+" at 83.309,38.28 h3 r90